# Altium PCB tinyFan.PcbDoc
Units mm, origin at the board's own origin, x right, y up, seen from the top; angles counter-clockwise.
Board outline 15.5 x 15.5 mm, 2 copper layers (Top Layer, Bottom Layer); 10 components, 8 nets, 39 pads, 1 vias.
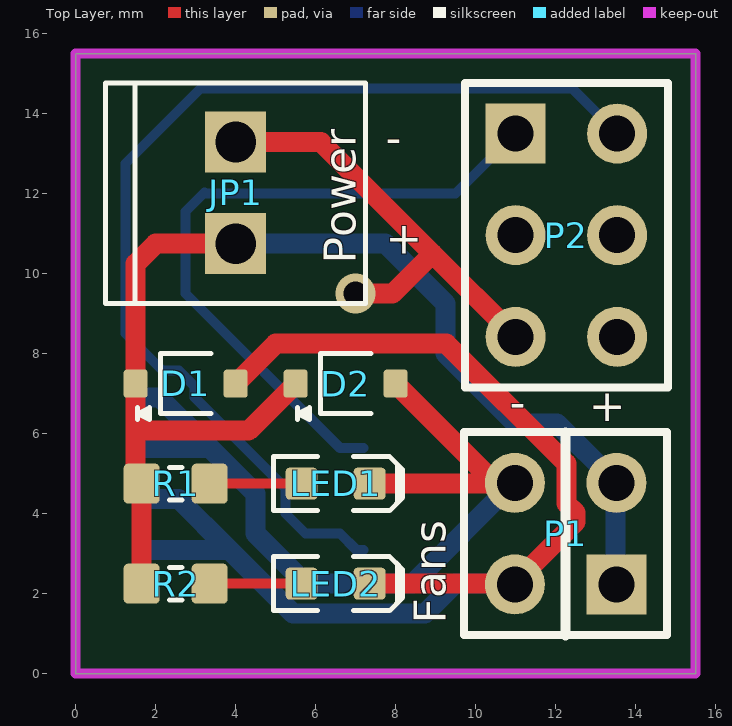
[diagram p0: Top Layer view]
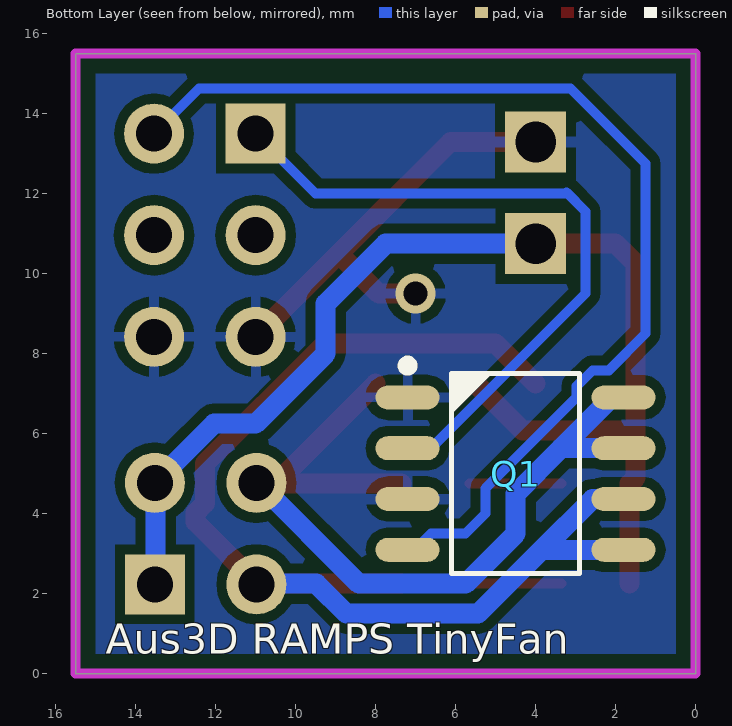
[diagram p1: Bottom Layer view, seen from below]
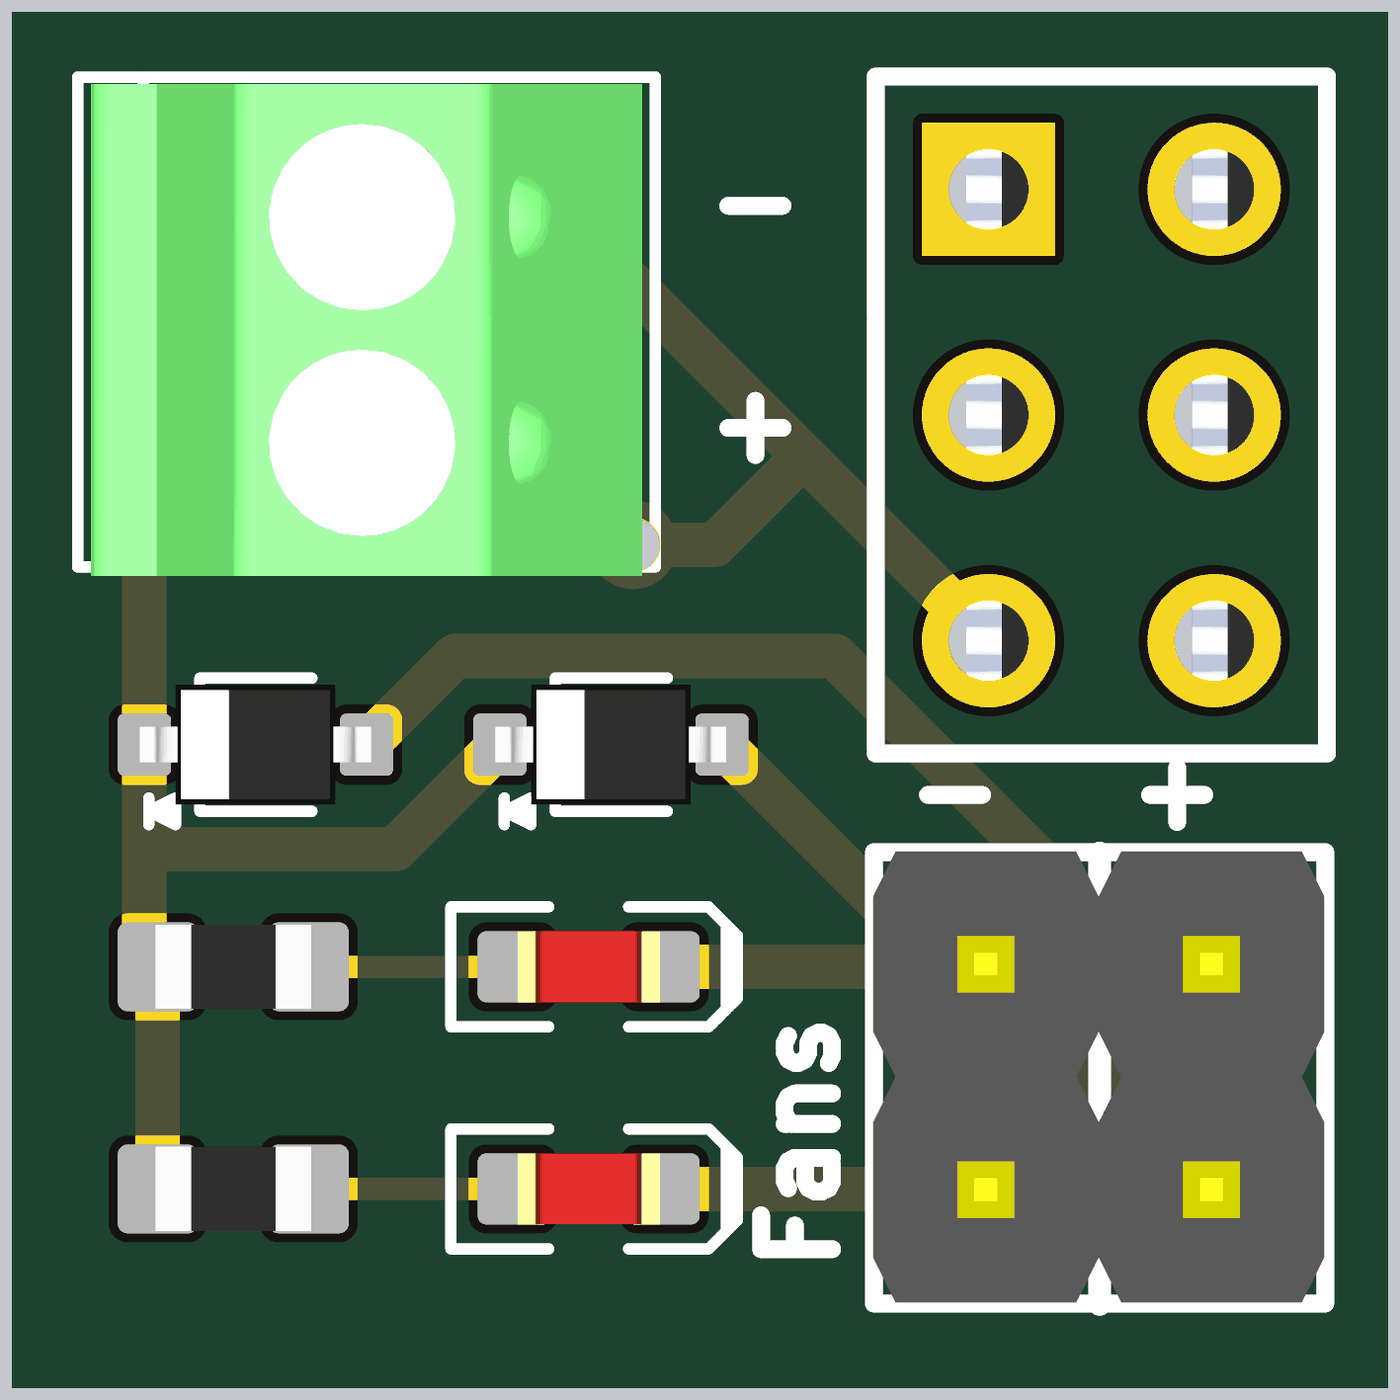
[diagram p2: 3D render of the assembled board from above, using the file's embedded part models]

## Layer stack, top to bottom
Top Solder: solder mask 0.0102, Solder Resist, Dk 3.5
Top Layer: signal copper 0.0356
Dielectric1: dielectric 0.32, FR-4, Dk 4.8
Bottom Layer: signal copper 0.0356
Bottom Solder: solder mask 0.0102, Solder Resist, Dk 3.5

## Board outline
0,5 0,0 15.5,0 15.5,15.5 0,15.5

## Design rules (kind name [scope] priority, off if disabled: settings)
Clearance [All] p1: gap=0.25
FabricationTestPointUsage TestPointUsage [All] p1: valid=0 allowmultiple=FALSE
FabricationTestpoint Testpoint [All] p1: side=3 testpointundercomponent=TRUE minsize=1.016 maxsize=2.54 preferedsize=1.524 minholesize=0 maxholesize=1.016 preferedholesize=0.813 testpointgrid=0.025 allowsidetop=TRUE allowsidebottom=TRUE usegrid=TRUE gridtolerance=0
PolygonConnect [All] p1: connectstyle=Relief reliefconductorwidth=0.254 reliefentries=4 polygonreliefangle="90 Angle" airgapwidth=0.254
RoutingVias [All] p1: holewidth=0.711 width=1.27 viastyle="Through Hole" minholewidth=0.711 minwidth=1.27 maxholewidth=0.711 maxwidth=1.27
SilkToSolderMaskClearance SilkscreenOverComponentPads [IsPad] p1: minsilkscreentomaskgap=0.254 clearancetoexposedcopper=TRUE
SolderMaskExpansion [All] p1: expansion=0.102
Width Width_Power [(InNet('12V') OR InNet('GND') OR InNet('FAN1') OR InNet('FAN2'))] p1: maxlimit=0.5 minlimit=0.5 preferedwidth=0.5 minimp=50.000000 maximp=50.000000 favimp=50.000000
Width [All] p2: maxlimit=0.25 minlimit=0.25 preferedwidth=0.25 minimp=50.000000 maximp=50.000000 favimp=50.000000
27 further rules are at their usual default settings.

## Components (designator, comment, footprint, x,y, rotation, side; value= is the part's Value field where it differs from the comment)
D1 "DIODE_75V_500mW" SOD323 2.75,7.25 r0 top
D2 "DIODE_75V_500mW" SOD323 6.75,7.25 r0 top
JP1 "Standard 2-pin 0.1\" header. Use with  - straight break away headers ( PRT-00116) - right angle break away headers (PRT-00553) - swiss pins (PRT-00743) - machine pins (PRT-00117) - female headers (PRT-00115)   Molex polarized connector foot print use with: PRT-08233 with associated crimp pins and housings.  2.54_SCREWTERM for use with  PRT-10571.  3.5mm Screw Terminal footprints for  PRT-08084  5mm Screw Terminal footprints for use with PRT-08432" 1X02_2.54_SCREWTERM 4,10.75 r90 top
LED1 "Red" LED-0603-RED 6.5,4.75 r0 top
LED2 "Red" LED-0603-RED 6.5,2.25 r0 top
P1 "Header 2X2" Header-2x2-male 10.98,4.77 r0 top
P2 "Header 3X2" Header-3x2-female 11,13.5 r0 top
Q1 "MOSFET_AO4818B" SOIC127P600X175-8AN 4.5,5 r180 bottom
R1 "Thick Film" RESC1608X55N 2.5,4.75 r0 top
R2 "Thick Film" RESC1608X55N 2.5,2.25 r0 top

## Footprints (in the part's own frame and the unit in brackets; to place one, negate y for a bottom-side part, rotate by r counter-clockwise, add the part's x,y. Pads: shape width x height; smd on the part's side, far side on the other; paste and mask are expansions set on the pad)
1X02_2.54_SCREWTERM [mil]
  rect 60x60 hole 40: P1(100,0) P2(0,0)
  silkscreen extent -59,-128 158,128, body extent -63,-122 155,122, height 335
Header-2x2-male [mm]
  rect 1.5x1.5 hole 0.9: 1(2.54,-2.54)
  round 1.5 hole 0.9: 2(0,-2.54) 3(2.54,0) 4(0,0)
  silkscreen extent -1.27,-3.81 3.81,1.27, body extent -1.28,-3.8 3.8,1.28, height 8.54
Header-3x2-female [mm]
  rect 1.5x1.5 hole 0.9: 1(0,0)
  round 1.5 hole 0.9: 2(2.54,0) 3(0,-2.54) 4(2.54,-2.54) 5(0,-5.08) 6(2.54,-5.08)
  silkscreen extent -1.27,-6.35 3.81,1.27, body extent -1.2,-6.35 3.8,1.4, height 8.55
LED-0603-RED [mm]
  round 0.254 on Mech15: 0(0,0)
  rrect25% 0.8x0.8 smd: A(-0.85,0) K(0.85,0)
  Top Layer pour cut-out: -0.5,0.5 0.5,0.5 0.5,-0.5 -0.5,-0.5
  silkscreen extent -1.55,-0.68 1.67,0.68, body extent -0.8,-0.4 0.8,0.4, height 0.75
RESC1608X55N [mm] "Chip Resistor, Body 1.6x0.8mm, EIA 0603, IPC Medium Density"
  round 0.254 on Mech15: 0(0,0)
  rrect25% 0.9x1 smd: 1(-0.85,0) 2(0.85,0)
  Top Layer pour cut-out: -0.6,0.5 -0.4,0.7 0.4,0.7 0.6,0.5 0.6,-0.5 0.4,-0.7 -0.4,-0.7 -0.6,-0.5
  silkscreen extent -0.15,-0.41 0.15,0.41, body extent -0.87,-0.47 0.88,0.48, height 0.54
SOD323 [mm] "SOD-323; 2 Leads; Body 1.8 x 1.35 mm, (LxW)"
  round 0.508 on Mech15: 0(0,0)
  rrect25% 0.6x0.7 smd: A(1.25,0) K(-1.25,0)
  silkscreen extent -1.2,-0.9 0.64,0.75, body extent -1.3,-0.68 1.3,0.68, height 1.1
SOIC127P600X175-8AN [mm] "SOIC, 8-Leads, Body 4.9x3.9mm, Pitch 1.27mm, IPC Medium Density"
  round 1 on Mech15: 0(0,0)
  oval 1.6x0.6 smd: 1(-2.7,1.905) 2(-2.7,0.635) 3(-2.7,-0.635) 4(-2.7,-1.905) 5(2.7,-1.905) 6(2.7,-0.635) 7(2.7,0.635) 8(2.7,1.905)
  silkscreen extent -2.83,-2.5 1.6,2.82, body extent -3,-2.45 3,2.45, height 1.75

## Part data
D1 D2: "Diode SMD 300mA 0.5W SOD323"
JP1: library part M022.54MM_SCREWTERM
LED1 LED2: library part LED_SMD_Red_0603_220mcd, "LED 0603 SMD Hyper Red 630nm 220mcd 20mA"
P1: "Header, 2-Pin, Dual row"
P2: "Header, 3-Pin, Dual row"
Q1: "MOSFET Dual-Channel 30V 8.5A SOIC-8 SMD"
R1 R2: library part RES_330R_0603_5%, "Resistor SMD chip 330 Ohm 0.1W 5% 0603"

## Via types
v1: diameter 1, hole 0.6, Top Layer to Bottom Layer, tented both sides, 1 vias

## Nets (pads, with @x,y where several pads share a name; then routed paths per layer and width w, separated by ;. In a path a pad name is that pad's centre, name@x,y a point inside that pad or via, vN(x,y) a via of type N, cw(c..) or ccw(c..) an arc to the next point about the centre after c; other vN are vias at no path point)
12V: D1.K D2.K JP1.P2 P1.1 P1.3 R1.1 R2.1 | length 30.5
  Top Layer w0.5: R2.1 R1.1 1.5,4.9 1.5,6.075 ; JP1.P2 2,10.75 1.5,10.25 D1.K 1.5,6.075 ; D2.K 4.325,6.075 1.5,6.075
  Bottom Layer w0.5: JP1.P2 7.75,10.75 9.25,9.25 9.25,8 11,6.25 12.04,6.25 13.5,4.79 P1.1@13.5,2.25
FAN1: D2.A LED1.K P1.4 Q1.7 Q1.8 | length 21.4
  Top Layer w0.5: LED1.K P1.4@10.5,4.75 ; D2.A P1.4@10.5,4.75 ; P1.4@10.92,4.75 P1.4@10.5,4.75
  Bottom Layer w0.5: Q1.7 3.365,5.635 ; Q1.8 2.095,6.905 3.365,5.635 ; P1.4@10.96,4.79 8.42,2.25 5.75,2.25 4.5,3.5 4.5,4.5 3.365,5.635
FAN1_PWM: P2.1 Q1.2 | length 17.1
  Bottom Layer w0.25: 3.223,12.027 2.75,11.554 2.75,9.5 6.615,5.635 Q1.2 ; 3.25,12 9.5,12 P2.1
FAN2: D1.A LED2.K P1.2 Q1.5 Q1.6 | length 30
  Top Layer w0.5: D1.A 5,8.25 9.268,8.25 12.27,5.248 12.27,4.252 12.5,4.022 12.5,3.79 10.96,2.25 LED2.K
  Bottom Layer w0.5: Q1.5 3.844,3.095 ; Q1.6 2.574,4.365 3.844,3.095 ; P1.2@10.96,2.25 9.481,2.25 8.731,1.5 5.439,1.5 3.844,3.095
FAN2_PWM: P2.2 Q1.4 | length 26.5
  Bottom Layer w0.25: Q1.4 7.015,3.095 6.61,3.5 5.75,3.5 5.25,4 5.25,4.634 2.975,6.909 2.975,7.185 2.58,7.58 2.17,7.58 1.25,8.5 1.25,12.75 3.125,14.625 12.415,14.625 P2.2
GND: JP1.P1 P2.5 P2.6 Q1.1 Q1.3 | length 11.4
  Top Layer w0.5: JP1.P1 6.13,13.29 8.92,10.5 ; v1(7,9.5) 7.92,9.5 8.92,10.5 ; P2.5 8.92,10.5
NetLED1_A: LED1.A R1.2 | length 2.3
  Top Layer w0.25: R1.2 LED1.A
NetLED2_A: LED2.A R2.2 | length 2.3
  Top Layer w0.25: R2.2 LED2.A
pads on no net: D1.0 D2.0 LED1.0 LED2.0 P2.3 P2.4 Q1.0 R1.0 R2.0

## Polygon pours and split planes (outlines as drawn)
GND on Bottom Layer "GND" (solid, remove dead copper, pour order 0): 0.5,15 0.5,0.5 15,0.5 15,15

## Keep-outs
Keep-Out Layer:
  lines w0.254: 0,0 0,15.5 15.5,15.5 15.5,0 0,0

## Silkscreen, mask and mechanical layers (free items; w line width, h text height)
Top Overlay:
  lines w0.254: 12.25,0.95 12.25,6.03
  text "-" at 7.75,13 h0.8
  text "+" at 7.75,10.5 h0.8
  text "Power" at 7,10.25 h0.8 r90
  text "-" at 11.25,7 h0.8 r180
  text "+" at 13.75,7 h0.8 r180
  text "Fans" at 9.25,1.25 h0.8 r90
Bottom Overlay:
  text "Aus3D RAMPS TinyFan" at 14.75,0.5 h0.75
Mechanical 16:
  drawing of 1874 lines, arcs and shapes, not listed
  text "1" at -98.754,94.611 h0.8
  text "2" at -26.11,94.611 h0.8
  text "3" at 47.042,94.611 h0.8
  text "4" at 119.94,94.611 h0.8
  text "A" at -133.095,71.599 h0.8
  text "A" at 153.925,71.599 h0.8
  text "B" at -133.095,23.542 h0.8
  text "B" at 153.925,23.542 h0.8
  text "C" at -133.095,-24.972 h0.8
  text "C" at 153.925,-24.972 h0.8
  text "ENGINEER:" at 38.99,-61.98 h0.8
  text "TITLE:" at 77.09,-61.98 h0.8
  text "PCB DESIGNER:" at 38.99,-69.473 h0.8
  text "D" at -133.095,-72.978 h0.8
  text "D" at 153.925,-72.978 h0.8
  text "DATE:" at 38.99,-77.22 h0.8
  text "PART NO.:" at 77.09,-77.22 h0.8
  text "REV:" at 130.43,-77.22 h0.8
  text "Altium Limited" at 5.97,-79.76 h0.8
  text ".PRINT_DATE" at 40.26,-80.268 h0.8
  text "12a Rodborough Rd" at 5.97,-82.3 h0.8
  text "Frenchs Forest" at 5.97,-84.84 h0.8
  text "FILE NAME:" at 38.99,-84.84 h0.8
  text "DWG NO:" at 77.09,-84.84 h0.8
  text "SCALE:" at 130.43,-84.84 h0.8
  text "NSW 2086" at 5.97,-87.38 h0.8
  text ".PCB_FILE_NAME_NO_PATH" at 40.26,-87.888 h0.8
  text "1" at -98.754,-93.349 h0.8
  text "2" at -26.11,-93.349 h0.8
  text "3" at 47.042,-93.349 h0.8
  text "4" at 119.94,-93.349 h0.8

## Dimensions
0,15.5 to 0,0 on Mechanical 1
0,15.5 to 15.5,15.5 on Mechanical 1